# Altium PCB PCB1.PcbDoc
Units mm, origin at the board's own origin, x right, y up, seen from the top; angles counter-clockwise.
Board outline 153.16 x 82.8 mm, 2 copper layers (Top Layer, Bottom Layer); 35 components, 46 nets, 162 pads, 2 vias.
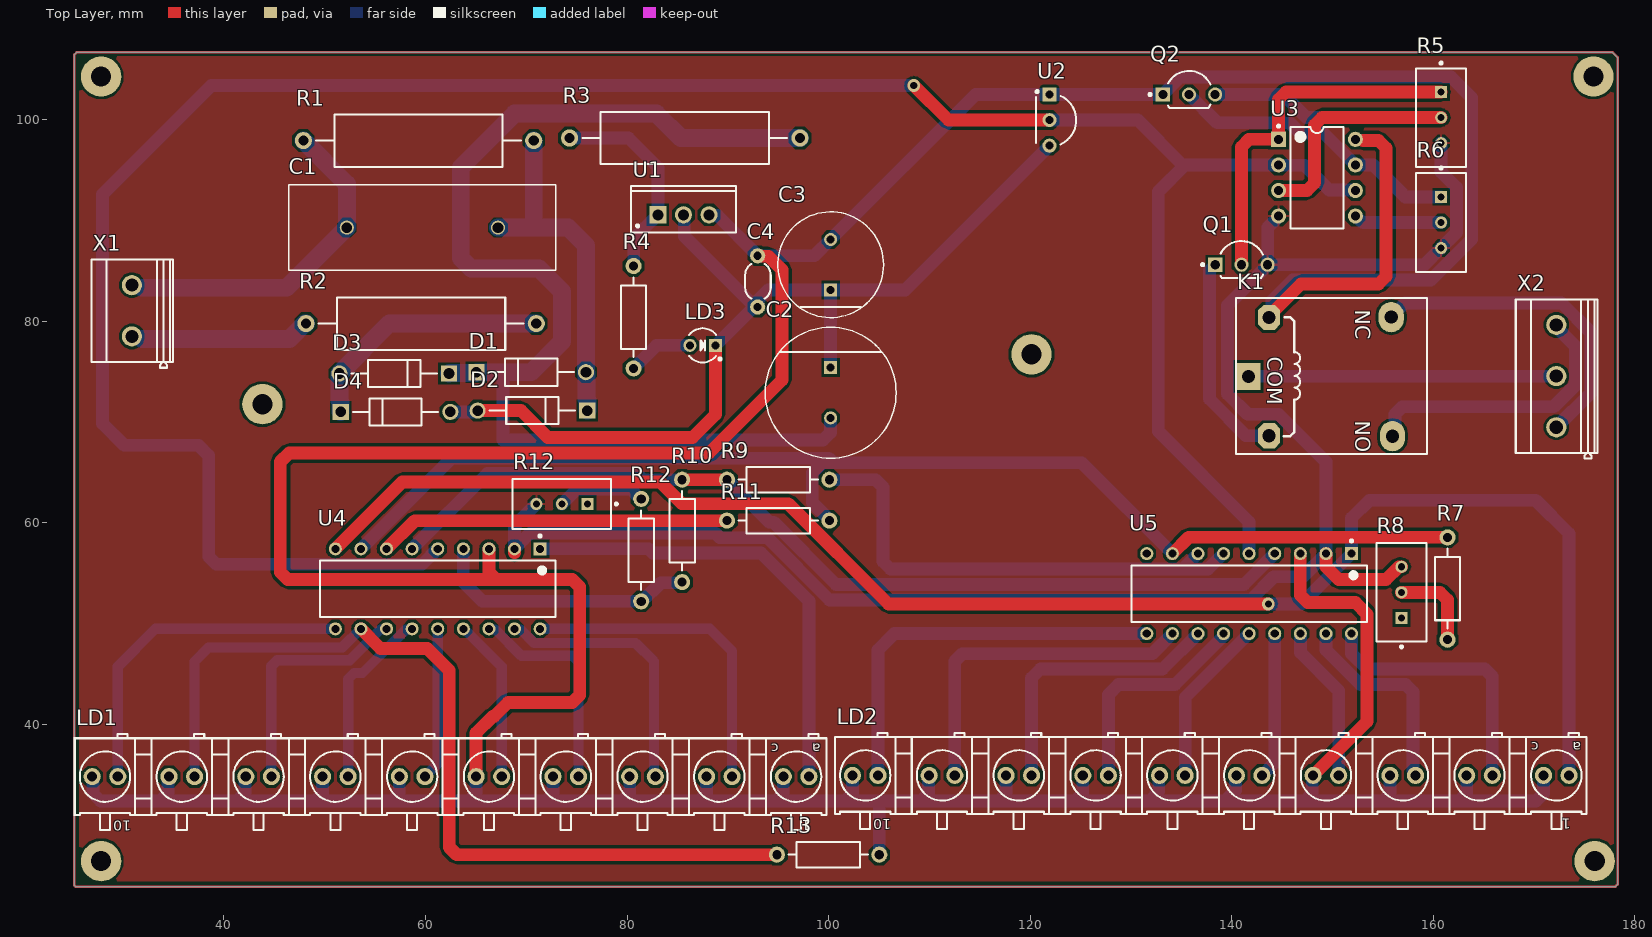
[diagram p0: Top Layer view]
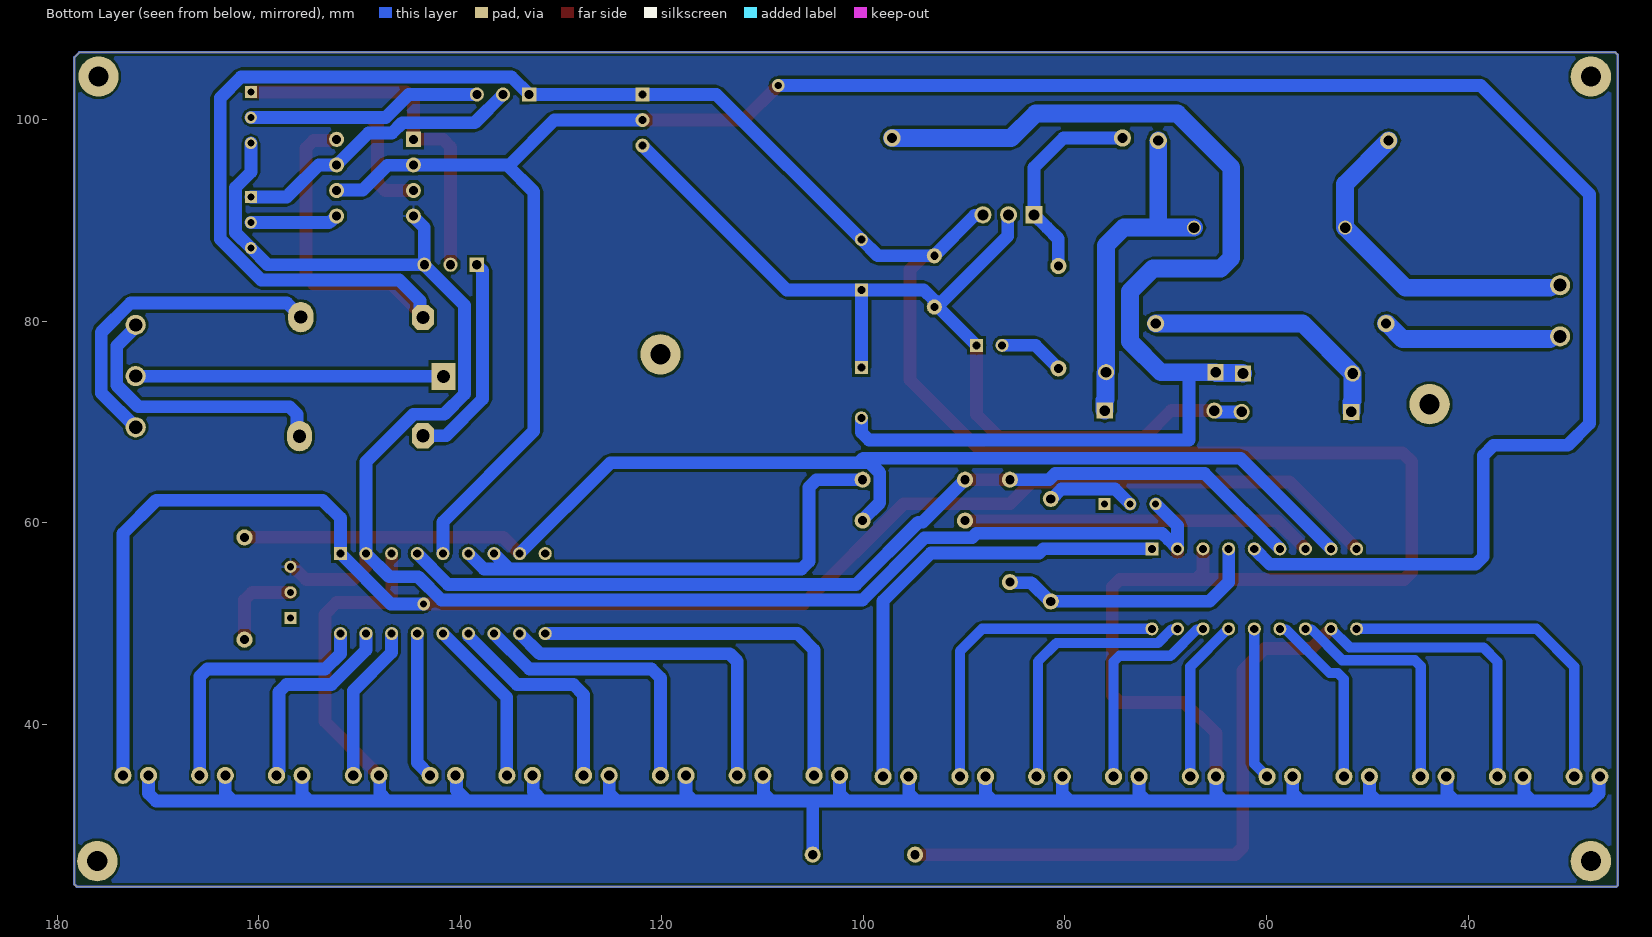
[diagram p1: Bottom Layer view, seen from below]
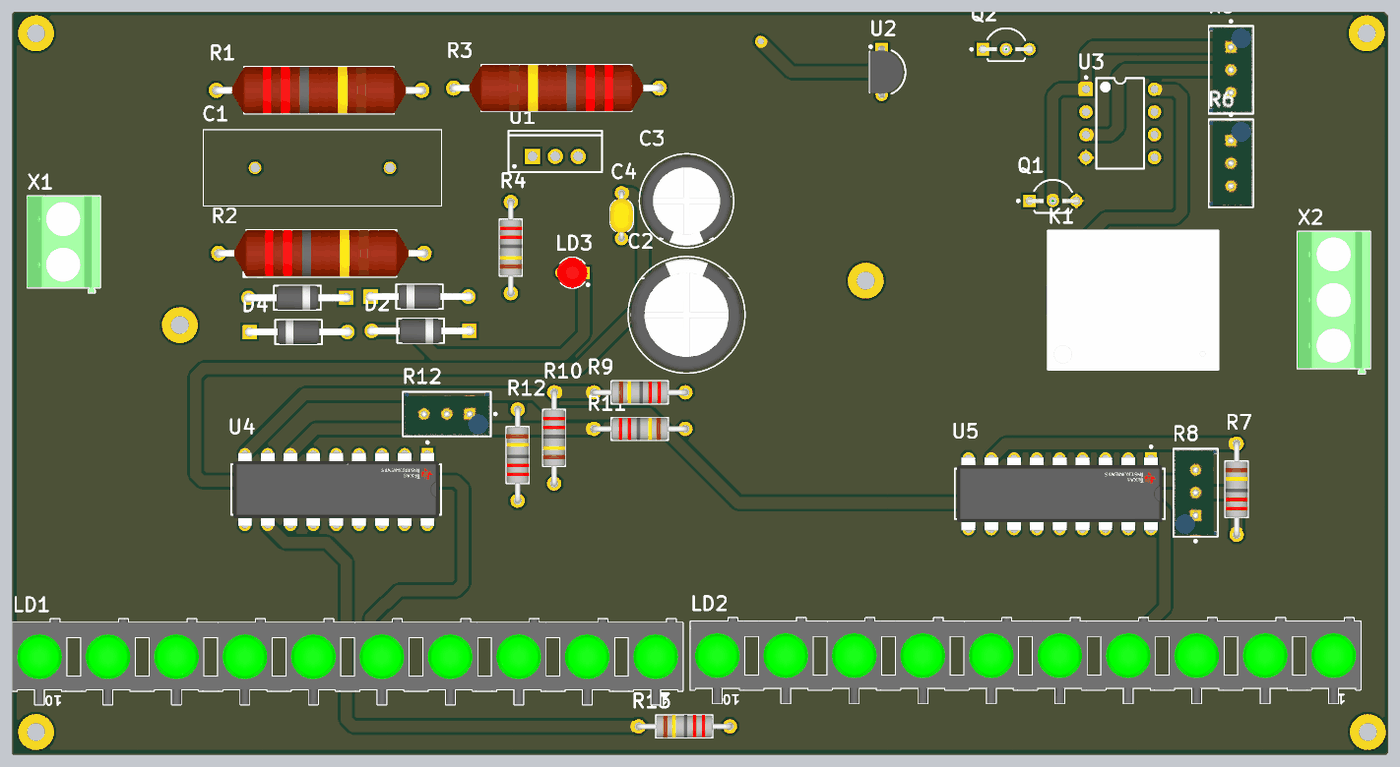
[diagram p2: 3D render of the assembled board from above, using the file's embedded part models]

## Layer stack, top to bottom
Top Solder: solder mask 0.0102, Solder Resist, Dk 3.5
Top Layer: signal copper 0.0356
Dielectric 1: dielectric 0.32, FR-4, Dk 4.8
Bottom Layer: signal copper 0.0356
Bottom Solder: solder mask 0.0102, Solder Resist, Dk 3.5

## Board outline
25.146,24.003 25.273,23.876 178.054,23.876 178.308,24.13 178.308,106.172 177.8,106.68 25.4,106.68 25.146,106.426

## Design rules (kind name [scope] priority, off if disabled: settings)
Clearance [All] p1: gap=0.254 ignorepadtopadclearanceinfootprint=FALSE except(0: Arc-Hole Track-Hole SMDPad-Hole THPad-Hole Via-Hole Fill-Hole Poly-Hole Region-Hole Text-Hole)
PolygonConnect [All] p1: connectstyle=Relief reliefconductorwidth=0.254 reliefentries=4 polygonreliefangle="90 Angle" airgapwidth=0.254
RoutingVias [All] p1: holewidth=0.711 width=1.27 viastyle="Through Hole" minholewidth=0.711 minwidth=1.27 maxholewidth=0.711 maxwidth=1.27
SolderMaskExpansion [All] p1: expansion=0.102 istentingtop=FALSE
Width [All] p1: maxlimit=2.032 minlimit=1.016 preferedwidth=1.27 minimp=50.000000 maximp=50.000000 favimp=50.000000
30 further rules are at their usual default settings.

## Components (designator, comment, footprint, x,y, rotation, side; value= is the part's Value field where it differs from the comment)
C1 "ECQE4105KTB" CAPRR1500W80L2650T850H2300 59.69,89.281 r0 top
C2 "ECA1HM102" FP-RAD-TH-D_12_5_0_5-L_25-MFG 100.203,72.898 r270 top
C3 "EEUFC1A102" FP-RAD-TH-D_10_0_5-L_16_1-MFG 100.203,85.598 r90 top
C4 "100pF" CAPRR508-254X381X584 92.964,83.947 r90 top
D1 "1N4007-E3/54" FP-1N4007-MFG 70.485,74.93 r0 top value=15pF
D2 "1N4007-E3/54" FP-1N4007-MFG 70.612,71.12 r180 top value=15pF
D3 "1N4007-E3/54" FP-1N4007-MFG 56.896,74.803 r180 top value=15pF
D4 "1N4007-E3/54" FP-1N4007-MFG 57.023,70.993 r0 top value=15pF
K1 "Relay 5pin Milon 5V" REL_MILON 148.844,74.549 r270 top
LD1 "Green" LED_MENTOR_2633.1180 96.774,34.798 r180 top
LD2 "Green" LED_MENTOR_2633.1180 172.212,34.925 r180 top
LD3 "Red" LED_3MM_RED_1C-2A 87.503,77.597 r180 top
Q1 "BC547BRL1G" ONSC-TO-92-3-29-11_AM_BL 140.97,85.598 r0 top
Q2 "BC547BRL1G" ONSC-TO-92-3-29-11_AM_BL 135.763,102.489 r0 top
R1 "1M" RES2286-1670X520 59.309,97.917 r0 top
R2 "100" RES2286-1670X520 59.563,79.756 r0 top
R3 "100" RES2286-1670X520 85.725,98.171 r180 top
R4 "1k1" RES1016-630X250 80.645,80.391 r90 top
R5 "3296W-1-103LF" FP-3296W-MFG 160.787,100.203 r180 top
R6 "3296W-1-103LF" FP-3296W-MFG 160.787,89.789 r180 top
R7 "1k" RES1016-630X250 161.417,53.467 r270 top
R8 "3296W-1-103LF" FP-3296W-MFG 156.845,53.086 r0 top
R9 "910" RES1016-630X250 94.996,64.262 r0 top
R10 "910" RES1016-630X250 85.471,59.182 r90 top
R11 "1k2" RES1016-630X250 94.996,60.198 r180 top
R12 "1R5" RES1016-630X250 81.407,57.277 r270 top
R12 "3296W-1-103LF" FP-3296W-MFG 73.533,61.849 r90 top
R13 "20k" RES1016-630X250 99.949,27.051 r0 top
U1 "L7805CV" TO220 85.598,90.551 r0 top
U2 "LM35DZ/NOPB" LP0003A 121.92,99.949 r0 top
U3 "LM358NG" ONSC-PDIP-8-626-05_M 148.463,94.234 r0 top
U4 "LM3914N-1" FP-NFK0018A-MFG 61.214,53.435 r270 top
U5 "LM3914N-1" FP-NFK0018A-MFG 141.732,52.959 r270 top
X1 "CON_Phoenix_MKDSN_02" CON_MKDSN1,5/2-5,08 30.861,81.026 r90 top
X2 "CON_Phoenix_MKDSN_03" CON_MKDSN1,5/3-5,08 172.212,74.549 r90 top

## Footprints (in the part's own frame and the unit in brackets; to place one, negate y for a bottom-side part, rotate by r counter-clockwise, add the part's x,y. Pads: shape width x height; smd on the part's side, far side on the other; paste and mask are expansions set on the pad)
CAPRR508-254X381X584 [mm] "Capacitor Radial Rounded (KEMET C317), Pin spacing 5.08mm - Body With 2.54mm X Body Length 3.81mm X Body Height 5.84mm"
  round 1.5 hole 0.8: 1(-2.54,0) 2(2.54,0)
  silkscreen extent -1.72,-1.3 1.72,1.24, body extent -2.79,-1.27 2.79,1.27, height 5.84
CAPRR1500W80L2650T850H2300 [mm]
  round 1.4 hole 1.05: 1(-7.5,0) 2(7.5,0)
  silkscreen extent -13.25,-4.25 13.25,4.25
CON_MKDSN1,5/2-5,08 [mm]
  round 2 hole 1.3: 1(-2.54,0) 2(2.54,0)
  silkscreen extent -5.65,-4.07 5.08,4.03, body extent -5.64,-4.05 5.09,4.05, height 10.03
CON_MKDSN1,5/3-5,08 [mm]
  round 2 hole 1.3: 1(-5.08,0) 2(0,0) 3(5.08,0)
  silkscreen extent -8.19,-4.07 7.62,4.03, body extent -8.19,-4.07 7.62,4.03, height 10.03
FP-1N4007-MFG [mm]
  rect 1.6x1.6 hole 1.05 paste-1000 mask+0: 1(-5.438,0)
  round 1.6 hole 1.05 paste-1000 mask+0: 2(5.438,0)
  silkscreen extent -4.24,-1.35 4.24,1.35, body extent -6.34,-1.45 6.34,1.45, height 0.25
FP-3296W-MFG [mm]
  rect 1.2x1.2 hole 0.7 paste-1000 mask+0: 1(0.005,-2.54)
  round 1.2 hole 0.7 paste-1000 mask+0: 2(0.005,0) 3(0.005,2.54)
  silkscreen extent -2.48,-5.52 2.48,4.89, body extent -2.58,-4.99 2.58,4.99, height 0.25
FP-NFK0018A-MFG [mm]
  rect 1.3x1.3 hole 0.8 paste-1000 mask+0: 1(-3.969,10.16)
  round 1.3 hole 0.8 paste-1000 mask+0: 2(-3.969,7.62) 3(-3.969,5.08) 4(-3.969,2.54) 5(-3.969,0) 6(-3.969,-2.54) 7(-3.969,-5.08) 8(-3.969,-7.62) 9(-3.969,-10.16) 10(3.969,-10.16) 11(3.969,-7.62) 12(3.969,-5.08) 13(3.969,-2.54) 14(3.969,0) 15(3.969,2.54) 16(3.969,5.08) 17(3.969,7.62) 18(3.969,10.16)
  silkscreen extent -5.37,-11.68 2.8,11.68, body extent -4.72,-12.04 4.72,12.04, height 0.25
FP-RAD-TH-D_10_0_5-L_16_1-MFG [mm]
  rect 1.3x1.3 hole 0.8 paste-1000 mask+0: 1(-2.5,0)
  round 1.3 hole 0.8 paste-1000 mask+0: 2(2.5,0)
  silkscreen extent -5.25,-5.25 5.25,5.25, body extent -5.35,-5.35 5.35,5.35, height 0.25
FP-RAD-TH-D_12_5_0_5-L_25-MFG [mm]
  rect 1.3x1.3 hole 0.8 paste-1000 mask+0: 1(-2.5,0)
  round 1.3 hole 0.8 paste-1000 mask+0: 2(2.5,0)
  silkscreen extent -6.5,-6.5 6.5,6.5, body extent -6.6,-6.6 6.6,6.6, height 0.25
LED_3MM_RED_1C-2A [mm] "LED, Red, Body Dia. 3.43 mm, Pin spacing 2.54mm"
  rect 1.3x1.3 hole 0.8: 1(-1.27,0)
  round 1.3 hole 0.8: 2(1.27,0)
  silkscreen extent -1.85,-1.7 1.34,1.7, body extent -1.71,-1.71 1.72,1.72, height 9.85
LED_MENTOR_2633.1180 [mm] "10x Diameter 5mm Green LED Vertical LED Array"
  round 1.7 hole 1: A1(-1.27,0) A2(6.35,0) A3(13.97,0) A4(21.59,0) A5(29.21,0) A6(36.83,0) A7(44.45,0) A8(52.07,0) A9(59.69,0) A10(67.31,0) C1(1.27,0) C2(8.89,0) C3(16.51,0) C4(24.13,0) C5(31.75,0) C6(39.37,0) C7(46.99,0) C8(54.61,0) C9(62.23,0) C10(69.85,0)
  silkscreen extent -3,-4.21 71.58,5.31, body extent -3,-4.21 71.58,5.31, height 17.1
LP0003A [mm] "TO, Flat Index; 3 In-Line, Formed Axial Leads; Body Dia. 4.8mm; Leads 0.56 x 0.41 mm (max)"
  rrect7% 1.4x1.4 hole 0.8: 1(0,2.54)
  round 1.4 hole 0.8: 2(0,0) 3(0,-2.54)
  silkscreen extent -1.35,-2.41 2.65,2.95, body extent -1.33,-2.83 2.35,2.83, height 9.01
ONSC-PDIP-8-626-05_M [mm] "DIP, 8-Leads, Body 10x7.1mm, Pitch 2.54mm"
  rect 1.5x1.5 hole 0.9: 1(-3.81,3.81)
  round 1.5 hole 0.9: 2(-3.81,1.27) 3(-3.81,-1.27) 4(-3.81,-3.81) 5(3.81,-3.81) 6(3.81,-1.27) 7(3.81,1.27) 8(3.81,3.81)
  silkscreen extent -3.93,-5.05 2.65,5.23, body extent -3.95,-5 3.95,5, height 5.33
ONSC-TO-92-3-29-11_AM_BL [mm] "TO, 3-Leads, Body Dia 4.7mm, Pitch 2.6mm"
  rect 1.4x1.4 hole 0.9: 1(-2.6,0)
  round 1.4 hole 0.9: 2(0,0) 3(2.6,0)
  silkscreen extent -3.97,-1.34 2.13,2.35, body extent -2.84,-1.34 2.84,2.35, height 5.33
REL_MILON [mm]
  rect 2.7x2.4 hole 1.3: 1(0.051,-7.177)
  oval 3x2.5 hole 1.3: 2(-5.842,6.985) 3(5.969,7.112)
  oct 2.5x2.2 hole 1.3: 4(-5.824,-5.127) 5(5.926,-5.127)
  silkscreen extent -7.75,-8.43 7.75,10.54, body extent -7.75,-8.46 7.75,10.54, height 15.8
RES1016-630X250 [mm] "Resistor, Axial, Pad spacing 10.16 mm - Body Lengh 6.3mm X Body Diameter 2.5mm"
  round 1.6 hole 0.9: 1(-5.08,0) 2(5.08,0)
  silkscreen extent -3.95,-1.25 3.95,1.25, body extent -5.38,-1.27 5.38,1.26, height 2.51
RES2286-1670X520 [mm] "Resistor, Axial, Pad spacing 22.22 mm - Body Lengh 16.7mm X Body Diameter 5.2mm"
  round 1.7 hole 1: 1(-11.43,0) 2(11.43,0)
  silkscreen extent -10.16,-2.6 10.16,2.6, body extent -11.82,-2.6 11.82,2.6, height 5.2
TO220 [mm] "TO, Thru-Hole, Vertical, Heatsink Mounted; 3 In-Line Leads; Pitch 2.54 mm"
  rect 1.7x1.7 hole 1.1: 1(-2.54,0)
  round 1.7 hole 1.1: 2(0,0) 3(2.54,0)
  silkscreen extent -5.2,-1.75 5.2,2.85, body extent -5.25,-1.8 5.25,2.9, height 19.7

## Part data
C1: Package=None, Availability=Unavailable, MP=ECQE4105KTB, Price=None
C2: library part CMP-05427-001975-1, "Aluminum Electrolytic Capacitors (Radial Lead Type) 1000uF ±20% 50V", Capacitance=1mF, Case/Package=Radial, Max Operating Temperature=85°C, Min Operating Temperature=-40°C, Package Quantity=200, Ripple Current=1.05A, Tolerance=20%, Voltage Rating=50V, Construction=RADIAL, Diameter=12.5mm, Dissipation Factor=0.12%, Height=25mm, Height - Seated (Max)=1.063inch, Lead Diameter=0.6mm, Lead Pitch=5mm, Lead/Base Style=Straight, Length=25mm, Life (Hours)=2000Hour, Mount="Through Hole", Packaging=Bulk, Polarity=Polar, Radiation Hardening=No, REACH SVHC="No SVHC", RoHS Compliant=Yes, Series=M, Termination=Radial, Voltage Rating (DC)=50V
C3: library part CMP-05427-000979-1, "Aluminum Electrolytic Capacitors (Radial Lead Type) AEC-Q200 Qualified 1000uF ±20% 10V", Capacitance=1mF, Case/Package=Radial, Dielectric Material=Aluminium, ESR (Equivalent Series Resistance)=68mR, Leakage Current=3uA, Max Operating Temperature=105°C, Min Operating Temperature=-55°C, Package Quantity=200, Ratings=AEC-Q200, Ripple Current=1.05A, Tolerance=20%, Voltage=10V, Construction=RADIAL, Contact Plating=Tin, Diameter=10mm, Height=16mm, Height - Seated (Max)=0.63inch, Impedance=68mR, Lead Diameter=0.6mm, Lead Free="Lead Free", Lead Pitch=5mm, Length=16mm, Life (Hours)=3000Hour, Mount="Through Hole", Packaging=Bulk, Radiation Hardening=No, REACH SVHC="No SVHC", RoHS Compliant=Yes, Series=FC, Size=16mm, Termination=Radial, Voltage Rating=10V, Voltage Rating (DC)=10V
C4: library part CCR_100PF_100V_5%_COG_508-254X381X584, "Non-polarised capacitor", Case="LS5.08 W2.54 x L3.81 x H5.84", Manufacturer=GENERIC, Manufacturer1 ComponentHeight=5.84mm, Manufacturer1 Example=KEMET, Manufacturer1 Part Number=C317C101J1G5TA, Tolerance=±5%, Voltage=100VDC, Author="CERN DEM JLC", Component Type=Standard, ComponentHeight=5.84mm, CreateDate=12/17/2008, HelpURL=\\cern.ch\dfs\Applications\Altium\Datasheets\CCR_KEMET_C317.pdf, LatestRevisionDate=12/17/2008, Manufacturer Part Number=CCR_100PF_100V_5%_COG_508-254X381X584, Mounted=Yes, Part Description="Radial Lead Type Multilayer Ceramic Capacitor", Part Number=CCR_100PF_100V_5%_COG_508-254X381X584, Pin Count=2, SMD=No, Socket=No, Status=None, Table="Capacitors THD", TC=COG
D1 D2 D3 D4: library part CMP-02540-000046-1, "DIODE GEN PURP 1KV 1A DO204AL", Capacitance=15pF, Forward Current=1A, Manufacturer=Vishay, Max Junction Temp=+150°C, Max Repetitive Reverse Voltage=1000V, Max Surge Forward Current=30A, Package=1N4007, Peak Reverse Current=30uA, Temperature="-50°C to +150°C", Temperature Range Low=-50°C, Automotive=No, Category=Diode, ComponentLink2Description=Datasheet, ComponentLink2URL=http://www.vishay.com/docs/88503/1n4001.pdf, Device Class L1="Discrete Semiconductors", Device Class L2=Diodes, Device Class L3="Rectifier Diodes", Digikey Description="DIODE GEN PURP 1KV 1A DO204AL", Height=2.7mm, Ipc Land Pattern Name=DIOPA1088W105L520D270, Lead Free=Yes, Manufacturer Part Number=1N4007-E3/54, Mouser Description="Rectifiers Vr/1000V Io/1A", Octopart=https://octopart.com/1n4007-e3%2F54-vishay-39548207, RoHS=TRUE, Temperature Range High=+150°C
K1: PartNumber=HJR-21FF-S-Z-05VDC
LD1 LD2: library part LED_MENTOR_2633.1180, "10x Diameter 5mm Green LED Vertical LED Array", Manufacturer=MENTOR, Manufacturer Part Number=2633.1180, Author="CERN DEM JLC", Color=Green, Component Type=Standard, ComponentHeight=17.1mm, CreateDate=11/28/2012, HelpURL=\\cern.ch\dfs\Applications\Altium\Datasheets\LED_MENTOR_2633.1180.pdf, LatestRevisionDate=3/7/2013, Mounted=Yes, PackageDescription="10x Diameter 5mm Green LED Vertical LED Array", Part Description="10x Diameter 5mm Green LED Vertical LED Array", Part Number=LED_MENTOR_2633.1180, Pin Count=20, SMD=No, Socket=No, Table="LEDs & Displays"
LD3: library part LED_AVAGO_HLMP-1700, "LED Red 1C 2A", Manufacturer="AVAGO TECHNOLOGIES", Manufacturer Part Number=HLMP-1700, Author="CERN DEM JLC", Color=Red, Component Type=Standard, ComponentHeight=6.35mm(min), CreateDate=6/12/2008, HelpURL=\\cern.ch\dfs\Applications\Altium\Datasheets\LED_AVAGO_HLMP-1700.pdf, LatestRevisionDate=3/17/2010, Mounted=Yes, PackageDescription="LED, Red, Body Dia. 3.43 mm, Pin spacing 2.54mm", Part Description="3mm Red LED", Part Number=LED_AVAGO_HLMP-1700, Pin Count=2, SMD=No, Socket=No, Table="LEDs & Displays"
Q1 Q2: library part CMP-1048-01605-1, "Amplifier Transistor, NPN Silicon, 3-Pin TO-92, Pb-Free, Tape and Reel", Manufacturer="On Semiconductor", ComponentLink1Description="Manufacturer URL", ComponentLink1URL=http://www.onsemi.com/, ComponentLink2Description=Datasheet, ComponentLink2URL=http://www.onsemi.com/pub_link/Collateral/BC546-D.PDF, ComponentLink3Description="Package Specification", ComponentLink3URL=http://www.onsemi.com/pub_link/Collateral/MAC97-D.PDF, DatasheetVersion="Rev. 7", fT Min (MHz)=150, IC Continuous (A)=0.1, Mounting Technology="Through Hole", PackageDescription="3-Pin Transistor Outline, Body 4.825 x 3.685 mm, Pitch 1.27 mm", PackageReference=TO-92-3-29-11_AM_BL, PackageVersion="Rev. AM", Packing="Tape and Reel", PartNumber=BC547BRL1G, Polarity=NPN, RoHS=TRUE
R1: library part RMF_1M_5%_3W_250PPM_2286-1670X520, "Resistor - 5%", Case="LS22.86 L16.7 x D5.2", Manufacturer=GENERIC, Manufacturer1 ComponentHeight=5.2mm, Manufacturer1 Example="VISHAY BCCOMPONENT", Manufacturer1 Part Number=PR03000201004JAC00, Power=3W, Tolerance=±5%, Author="CERN DEM JLC", Component Type=Standard, ComponentHeight=5.2mm, CreateDate=6/23/2008, HelpURL=\\cern.ch\dfs\Applications\Altium\Datasheets\RMF_VISHAY_PR03.pdf, LatestRevisionDate=10/1/2012, Manufacturer Part Number=RMF_1M_5%_3W_250PPM_2286-1670X520, Mounted=Yes, Part Description="Leaded Power Metal Film Resistor", Part Number=RMF_1M_5%_3W_250PPM_2286-1670X520, Pin Count=2, SMD=No, Socket=No, Status=Preferred, Table="Resistors THD", TC=±250ppm/°C
R2 R3: library part RMF_100R_5%_3W_250PPM_2286-1670X520, "Resistor - 5%", Case="LS22.86 L16.7 x D5.2", Manufacturer=GENERIC, Manufacturer1 ComponentHeight=5.2mm, Manufacturer1 Example="VISHAY BCCOMPONENT", Manufacturer1 Part Number=PR03000201000JAC00, Power=3W, Tolerance=±5%, Author="CERN DEM JLC", Component Type=Standard, ComponentHeight=5.2mm, CreateDate=6/19/2008, HelpURL=\\cern.ch\dfs\Applications\Altium\Datasheets\RMF_VISHAY_PR03.pdf, LatestRevisionDate=10/1/2012, Manufacturer Part Number=RMF_100R_5%_3W_250PPM_2286-1670X520, Mounted=Yes, Part Description="Leaded Power Metal Film Resistor", Part Number=RMF_100R_5%_3W_250PPM_2286-1670X520, Pin Count=2, SMD=No, Socket=No, Status=Preferred, Table="Resistors THD", TC=±250ppm/°C
R4: library part RMF_1K1_1%_0.6W_50PPM_1016-630X250, "Resistor - 1%", Case="LS10.16 L6.3 x D2.5", Manufacturer=GENERIC, Manufacturer1 ComponentHeight=2.5mm, Manufacturer1 Example="VISHAY BEYSCHLAG", Manufacturer1 Part Number=MBB02070C1101FCT00, Power=0.6W, Tolerance=±1%, Author="CERN DEM JLC", Component Type=Standard, ComponentHeight=2.5mm, CreateDate=12/4/2007, HelpURL=\\cern.ch\dfs\Applications\Altium\Datasheets\RMF_VISHAY_MBB0207.pdf, LatestRevisionDate=4/7/2008, Manufacturer Part Number=RMF_1K1_1%_0.6W_50PPM_1016-630X250, Mounted=Yes, Part Description="Leaded Metal Film Resistor", Part Number=RMF_1K1_1%_0.6W_50PPM_1016-630X250, Pin Count=2, SMD=No, Socket=No, Status=Preferred, Table="Resistors THD", TC=±50ppm/°C
R5 R6 R8 R12: library part CMP-1747-00001-5, "TRIMMER 10K OHM 0.5W PC PIN TOP", Color=Blue, Insulation Resistance=1GR, Max Operating Temperature=125°C, Max Power Dissipation=500mW, Min Operating Temperature=-55°C, Package Quantity=50, Resistance=10kR, Resistance Tolerance=10%, Resistor Type=Cermet, Temperature Coefficient=100ppm/°C, Contact Plating=Tin, Depth=4.83mm, Height=11.55mm, Lead Free="Lead Free", Length=9.53mm, Military Standard=Not, Mount="Through Hole", Number of Turns=25, Packaging=Rail/Tube, Power Rating=500mW, Radiation Hardening=No, Reach SVHC Compliant=Yes, RoHS Compliant=Yes, Series=3296, Taper=Linear, Technology=CERMET, Termination=Pin, Tolerance=10%, Weight=0.03oz, Width=9.53mm
R7: library part RMF_1K_1%_0.6W_50PPM_1016-630X250, "Resistor - 1%", Case="LS10.16 L6.3 x D2.5", Manufacturer=GENERIC, Manufacturer1 ComponentHeight=2.5mm, Manufacturer1 Example="VISHAY BEYSCHLAG", Manufacturer1 Part Number=MBB02070C1001FCT00, Power=0.6W, Tolerance=±1%, Author="CERN DEM JLC", Component Type=Standard, ComponentHeight=2.5mm, CreateDate=12/4/2007, HelpURL=\\cern.ch\dfs\Applications\Altium\Datasheets\RMF_VISHAY_MBB0207.pdf, LatestRevisionDate=4/7/2008, Manufacturer Part Number=RMF_1K_1%_0.6W_50PPM_1016-630X250, Mounted=Yes, Part Description="Leaded Metal Film Resistor", Part Number=RMF_1K_1%_0.6W_50PPM_1016-630X250, Pin Count=2, SMD=No, Socket=No, Status=Preferred, Table="Resistors THD", TC=±50ppm/°C
R9 R10: library part RMF_910R_1%_0.6W_50PPM_1016-630X250, "Resistor - 1%", Case="LS10.16 L6.3 x D2.5", Manufacturer=GENERIC, Manufacturer1 ComponentHeight=2.5mm, Manufacturer1 Example="VISHAY BEYSCHLAG", Manufacturer1 Part Number=MBB02070C9100FCT00, Power=0.6W, Tolerance=±1%, Author="CERN DEM JLC", Component Type=Standard, ComponentHeight=2.5mm, CreateDate=12/4/2007, HelpURL=\\cern.ch\dfs\Applications\Altium\Datasheets\RMF_VISHAY_MBB0207.pdf, LatestRevisionDate=4/7/2008, Manufacturer Part Number=RMF_910R_1%_0.6W_50PPM_1016-630X250, Mounted=Yes, Part Description="Leaded Metal Film Resistor", Part Number=RMF_910R_1%_0.6W_50PPM_1016-630X250, Pin Count=2, SMD=No, Socket=No, Status=Preferred, Table="Resistors THD", TC=±50ppm/°C
R11: library part RMF_1K2_1%_0.6W_50PPM_1016-630X250, "Resistor - 1%", Case="LS10.16 L6.3 x D2.5", Manufacturer=GENERIC, Manufacturer1 ComponentHeight=2.5mm, Manufacturer1 Example="VISHAY BEYSCHLAG", Manufacturer1 Part Number=MBB02070C1201FCT00, Power=0.6W, Tolerance=±1%, Author="CERN DEM JLC", Component Type=Standard, ComponentHeight=2.5mm, CreateDate=12/4/2007, HelpURL=\\cern.ch\dfs\Applications\Altium\Datasheets\RMF_VISHAY_MBB0207.pdf, LatestRevisionDate=4/7/2008, Manufacturer Part Number=RMF_1K2_1%_0.6W_50PPM_1016-630X250, Mounted=Yes, Part Description="Leaded Metal Film Resistor", Part Number=RMF_1K2_1%_0.6W_50PPM_1016-630X250, Pin Count=2, SMD=No, Socket=No, Status=Preferred, Table="Resistors THD", TC=±50ppm/°C
R12: library part RMF_1R5_1%_0.6W_50PPM_1016-630X250, "Resistor - 1%", Case="LS10.16 L6.3 x D2.5", Manufacturer=GENERIC, Manufacturer1 ComponentHeight=2.5mm, Manufacturer1 Example="VISHAY BEYSCHLAG", Manufacturer1 Part Number=MBB02070C1508FCT00, Power=0.6W, Tolerance=±1%, Author="CERN DEM JLC", Component Type=Standard, ComponentHeight=2.5mm, CreateDate=12/4/2007, HelpURL=\\cern.ch\dfs\Applications\Altium\Datasheets\RMF_VISHAY_MBB0207.pdf, LatestRevisionDate=4/7/2008, Manufacturer Part Number=RMF_1R5_1%_0.6W_50PPM_1016-630X250, Mounted=Yes, Part Description="Leaded Metal Film Resistor", Part Number=RMF_1R5_1%_0.6W_50PPM_1016-630X250, Pin Count=2, SMD=No, Socket=No, Status="Not recommended", Table="Resistors THD", TC=±50ppm/°C
R13: library part RMF_20K_1%_0.6W_50PPM_1016-630X250, "Resistor - 1%", Case="LS10.16 L6.3 x D2.5", Manufacturer=GENERIC, Manufacturer1 ComponentHeight=2.5mm, Manufacturer1 Example="VISHAY BEYSCHLAG", Manufacturer1 Part Number=MBB02070C2002FCT00, Power=0.6W, Tolerance=±1%, Author="CERN DEM JLC", Component Type=Standard, ComponentHeight=2.5mm, CreateDate=12/4/2007, HelpURL=\\cern.ch\dfs\Applications\Altium\Datasheets\RMF_VISHAY_MBB0207.pdf, LatestRevisionDate=4/7/2008, Manufacturer Part Number=RMF_20K_1%_0.6W_50PPM_1016-630X250, Mounted=Yes, Part Description="Leaded Metal Film Resistor", Part Number=RMF_20K_1%_0.6W_50PPM_1016-630X250, Pin Count=2, SMD=No, Socket=No, Status=Preferred, Table="Resistors THD", TC=±50ppm/°C
U1: library part CMP-0244-00483-1, "Positive Voltage Regulator, 5V, 3-Pin TO-220", ComponentLink1Description="Manufacturer URL", ComponentLink1URL=http://www.st.com, ComponentLink2Description=Datasheet, ComponentLink2URL=http://www.st.com/internet/com/TECHNICAL_RESOURCES/TECHNICAL_LITERATURE/DATASHEET/CD00000444.pdf, ComponentLink3Description="Package Specification", ComponentLink3URL=http://www.st.com/internet/com/TECHNICAL_RESOURCES/TECHNICAL_LITERATURE/PACKAGE_INFORMATION/CD00004649.pdf, DatasheetVersion=16/11/2011, PackageDescription="TO, Thru-Hole, Vertical, Heatsink Mounted; 3 In-Line Leads; Pitch 2.54 mm", PackageReference=TO220, PackageVersion=ver3.0
U2: library part CMP-0066-00030-3, "Precision Centigrade Temperature Sensor, 3-pin TO-92, Pb-Free", Manufacturer="Texas Instruments", PackageTopMarking=NSXYTT*LM35*DZ, PowerWise=N, Code_JEDEC=TO-226-AA, ComponentLink1Description="Datasheet URL", ComponentLink1URL=http://www.ti.com/general/docs/lit/getliterature.tsp?genericPartNumber=LM35&fileType=pdf, CompType="Temp Sensor IC", PackageDescription="TO-92, Molded, 3 Lead", PackageReference=LP0003A, PinCount=3, RoHS=Y
U3: library part CMP-1310-00096-1, "Single Supply Dual Operational Amplifier, 3 to 32 V, 0 to 70 degC, 8-Pin PDIP, Pb-Free, Tube", Manufacturer="On Semiconductor", ComponentLink1Description="Manufacturer URL", ComponentLink1URL=http://www.onsemi.com/, ComponentLink2Description=Datasheet, ComponentLink2URL=http://www.onsemi.cn/pub_link/Collateral/LM358-D.PDF, ComponentLink3Description="Package Specification", ComponentLink3URL=http://www.onsemi.com/pub_link/Collateral/LM211-D.PDF, DatasheetVersion="Rev. 27", Mounting Technology="Through Hole", PackageDescription="8-Pin Plastic Dual-In Line Package, Body 9.52 x 6.605 mm, Pitch 2.54 mm", PackageReference=PDIP-8-626-05, PackageVersion="Rev. M, 04/2010", Packing=Tube, PartNumber=LM358NG, RoHS=TRUE, VCC Max (V)=32, VCC Min (V)=3
U4 U5: library part CMP-0058-00006-4, "IC DRVR DOT/BAR DISPLAY 18DIP", Case/Package=DIP, Max Input Voltage=12V, Max Operating Temperature=70°C, Max Output Voltage=1.34V, Max Power Dissipation=1.365W, Max Supply Current=9.2kA, Max Supply Voltage=25V, Min Input Voltage=1.2V, Min Operating Temperature=0°C, Nominal Supply Current=9.2mA, Operating Supply Current=6.1mA, Output Current=30mA, Output Voltage=1.28V, Package Quantity=20, Height=3.3mm, Lead Free="Contains Lead", Length=22.86mm, Mount="Through Hole", Number of Channels=10, Number of Outputs=10, Number of Pins=18, Number of Segments=10, Packaging=Rail/Tube, Power Dissipation=1.365W, Radiation Hardening=No, REACH SVHC="No SVHC", RoHS Compliant=No, Series=-, Supply Current=9.2mA, Termination="Through Hole", Width=6.35mm
X1 X2: Manufacturer="PHOENIX CONTACT", Max Current="13.5 A", Voltage="400 V", Category=Connector, Company="SJ Libraries", ComponentLink1Description=Datasheet, ComponentLink2Description=Reference, Connector type="PCB Terminal Block", designer="Eng. Saeid Jorablo", HelpURL=http://s3.picofile.com/file/7443264187/Coming_Soon_logo.gif, Mounting Technology=Through-Hole, Publisher="SJ UnLimited", Revision 1="2012/10/1 : Adding Model", Status=Unreleased, Update=2012/10/1
  X1: Pin Count=2, Positions=2
  X2: Pin Count=3, Positions=3

## Free pads (board coordinates)
  round 4 hole 2: q(27.813,26.416) q(27.813,104.267) q(43.815,71.755) q(120.142,76.708) q(175.895,104.267) q(176.022,26.416)

## Via types
v1: diameter 1.27, hole 0.711, Top Layer to Bottom Layer, 2 vias

## Nets (pads, with @x,y where several pads share a name; then routed paths per layer and width w, separated by ;. In a path a pad name is that pad's centre, name@x,y a point inside that pad or via, vN(x,y) a via of type N, cw(c..) or ccw(c..) an arc to the next point about the centre after c; other vN are vias at no path point)
+5: C3.2 C4.2 K1.4 LD1.C1 LD1.C2 LD1.C3 LD1.C4 LD1.C5 LD1.C6 LD1.C7 LD1.C8 LD1.C9 LD1.C10 LD2.C1 LD2.C2 LD2.C3 LD2.C4 LD2.C5 LD2.C6 LD2.C7 LD2.C8 LD2.C9 LD2.C10 Q2.1 R13.2 U1.3 U2.1 U3.8 U4.3 U5.3 | length 524.7
  Top Layer w1.27: LD1.C5 65.024,39.116 66.675,40.767 66.802,40.767 68.199,42.164 74.567,42.164 75.311,42.908 75.311,53.612 74.567,54.356 67.038,54.356 ; U4.3 66.294,55.865 66.294,55.1 67.038,54.356 ; C4.2 93.008,86.443 94.024,86.443 95.377,85.09 95.377,74.168 88.138,66.929 46.482,66.929 45.593,66.04 45.593,55.1 46.337,54.356 67.038,54.356 ; K1.4 143.717,80.523 146.886,83.693 154.577,83.693 155.321,84.437 155.321,97.173 154.577,97.917 153.035,97.917 ; U5.3 146.812,52.814 147.556,52.07 152.273,52.07 153.431,50.912 153.431,40.274 LD2.C4
  Bottom Layer w1.27: LD1.C10 27.006,34.716 27.006,33.129 27.75,32.385 33.673,32.385 ; LD1.C9 34.462,34.716 34.462,33.174 33.673,32.385 ; LD1.C8 42.082,34.716 42.082,33.174 41.293,32.385 ; LD1.C7 49.784,33.129 49.04,32.385 ; LD1.C6 57.404,33.129 56.66,32.385 ; LD1.C5 65.024,33.129 64.28,32.385 ; LD1.C4 72.644,33.129 71.9,32.385 ; LD1.C3 80.264,33.129 79.52,32.385 ; LD1.C2 87.884,33.129 87.14,32.385 ; U1.3 88.22,90.469 88.982,90.469 C4.2 98.584,86.487 100.195,88.098 C3.2 114.594,102.489 U2.1 Q2.1 134.906,104.232 161.75,104.232 163.83,102.152 163.83,88.142 159.762,84.074 146.05,84.074 144.004,82.028 144.004,80.66 K1.4 ; LD1.C1 95.504,33.129 94.76,32.385 ; LD2.C10 102.362,33.129 101.618,32.385 ; R13.2 105.029,32.385 ; LD2.C9 109.9,34.843 109.9,33.174 109.111,32.385 ; LD2.C8 117.602,33.129 116.858,32.385 ; LD2.C7 125.222,33.129 124.478,32.385 ; LD2.C6 132.76,34.843 132.76,33.301 131.844,32.385 ; LD2.C5 140.38,34.843 140.38,33.446 139.319,32.385 ; LD2.C4 148,34.843 148,33.174 147.211,32.385 ; LD2.C3 155.702,33.129 154.958,32.385 ; LD2.C2 163.322,33.129 162.578,32.385 ; LD2.C1 170.942,33.129 170.198,32.385 162.578,32.385 ; 33.673,32.385 41.293,32.385 ; 41.293,32.385 49.04,32.385 ; 49.04,32.385 56.66,32.385 ; 56.66,32.385 64.28,32.385 ; 64.28,32.385 71.9,32.385 ; 71.9,32.385 79.52,32.385 ; 79.52,32.385 87.14,32.385 ; 87.14,32.385 94.76,32.385 ; 94.76,32.385 101.618,32.385 ; 101.618,32.385 105.029,32.385 ; 105.029,32.385 109.111,32.385 ; 109.111,32.385 116.858,32.385 ; 116.858,32.385 124.478,32.385 ; 124.478,32.385 131.844,32.385 ; 131.844,32.385 139.319,32.385 ; 139.319,32.385 147.211,32.385 ; 147.211,32.385 154.958,32.385 ; 154.958,32.385 162.578,32.385
GND: Q1.3 R5.3 R6.3 R8.3 R12.3 U3.4 U4.2 U5.2 | length 172.4
  Top Layer w1.27: U4.2@68.834,57.023 U4.2 ; U5.2 149.358,56.922 149.358,55.62 150.622,54.356 155.321,54.356 156.591,55.626 R8.3
  Bottom Layer w1.27: U4.2 68.834,57.412 U4.2@68.84,57.418 ; R12.3 68.84,59.701 U4.2@68.84,57.418 ; U3.4 144.653,90.362 143.57,89.279 Q1.3 ; R5.3 160.782,94.786 162.306,93.262 162.306,88.773 R6.3 159.131,85.598 Q1.3 ; U4.2@68.84,57.418 69.738,58.316 69.738,58.325 70.356,58.943 88.782,58.943 89.216,58.509 93.923,58.509 100.091,52.341 141.879,52.341 144.17,54.631 147.056,54.631 U5.2 149.352,66.045 144.635,70.762 141.595,70.762 139.578,72.78 139.578,81.57 143.57,85.563 Q1.3
NetC1_1: C1.1 R1.1 X1.2 | length 33.2
  Bottom Layer w1.778: 31.877,83.312 46.221,83.312 C1.1 52.19,93.606 R1.1
NetC1_2: C1.2 D1.2 D2.1 R1.2 | length 34.6
  Bottom Layer w1.778: C1.2 70.739,89.281 ; R1.2 70.739,89.281 ; D2.1 76.073,71.143 76.073,72.151 75.986,72.238 75.986,74.867 D1.2 75.923,87.526 74.168,89.281 70.739,89.281
NetC2_1: C2.1 C3.1 C4.1 D2.2 D4.2 LD3.1 U1.2 U2.3 | length 96.7
  Top Layer w1.27: D2.2 69.469,71.12 72.136,68.453 86.487,68.453 88.773,70.739 LD3.1
  Bottom Layer w1.27: D4.2 64.958,70.993 65.085,71.12 D2.2 ; U1.2 85.68,90.469 85.68,88.437 C4.1@92.666,81.451 ; LD3.1 92.539,81.363 92.92,81.363 C4.1 93.008,81.451 93.008,82.086 94.02,83.098 C3.1 ; C2.1 C3.1 ; U2.3 107.609,83.098 C3.1
NetC2_2: C2.2 D1.1 D3.1 R3.1 | length 115.9
  Bottom Layer w1.27: 68.072,74.93 67.691,74.549 67.691,68.199 99.459,68.199 100.203,68.943 C2.2
  Bottom Layer w1.778: D3.1 62.398,74.867 64.983,74.867 D1.1 68.072,74.93 70.485,74.93 73.533,77.978 73.533,82.931 71.247,85.217 64.542,85.217 63.5,86.259 63.5,95.25 68.834,100.584 82.931,100.584 85.344,98.171 R3.1
NetD3_2: D3.2 D4.1 R2.2 | length 25.4
  Bottom Layer w1.778: D4.1 51.585,71.986 51.473,72.098 51.473,74.788 D3.2 56.411,79.756 R2.2
NetK1_1: K1.1 X2.2 | length 30.6
  Bottom Layer w1.27: K1.1 141.692,74.524 172.187,74.524 X2.2
NetK1_2: K1.2 X2.1 | length 32.4
  Bottom Layer w1.27: K1.2 155.829,80.429 157.188,81.788 172.724,81.788 175.625,78.887 175.625,72.882 X2.1
NetK1_3: K1.3 X2.3 | length 28.1
  Bottom Layer w1.27: K1.3 156.191,68.815 156.191,70.757 156.935,71.501 171.958,71.501 174.101,73.644 174.101,77.542 172.212,79.431 X2.3
NetK1_5: K1.5 Q1.1 | length 21
  Bottom Layer w1.27: Q1.1 137.795,85.023 137.795,72.259 141.431,68.623 K1.5
NetLD1_A1: LD1.A1 U4.1 | length 46.2
  Bottom Layer w1.27: U4.1 82.131,57.404 82.55,56.985 93.291,56.985 98.044,52.232 LD1.A1
NetLD1_A2: LD1.A2 U4.18 | length 32.4
  Bottom Layer w1.016: U4.18 88.201,49.466 90.424,47.244 LD1.A2
NetLD1_A3: LD1.A3 U4.17 | length 26.7
  Bottom Layer w1.016: U4.17 68.888,49.412 69.431,49.412 70.789,48.054 80.851,48.054 82.673,46.232 82.673,34.929 LD1.A3
NetLD1_A4: LD1.A4 U4.16 | length 21.6
  Bottom Layer w1.016: U4.16 66.348,49.412 66.891,49.412 69.519,46.784 74.589,46.784 75.184,46.189 LD1.A4
NetLD1_A5: LD1.A5 U4.15 | length 16.2
  Bottom Layer w1.016: U4.15@63.817,49.466 67.564,45.72 LD1.A5
NetLD1_A6: LD1.A6 U4.14 | length 15.1
  Bottom Layer w1.016: LD1.A6 61.214,36.068 U4.14@61.214,49.39
NetLD1_A7: LD1.A7 U4.13 | length 18.1
  Bottom Layer w1.016: LD1.A7 52.324,44.49 52.919,45.085 53.749,45.085 58.077,49.412 58.62,49.412 U4.13
NetLD1_A8: LD1.A8 U4.12 | length 23.9
  Bottom Layer w1.016: LD1.A8 44.704,45.76 45.299,46.355 52.479,46.355 55.537,49.412 56.08,49.412 U4.12
NetLD1_A9: LD1.A9 R13.1 U4.11 | length 90.1
  Top Layer w1.27: U4.11 55.534,47.527 60.169,47.527 62.357,45.339 62.357,27.795 63.101,27.051 R13.1
  Bottom Layer w1.016: LD1.A9 37.084,46.228 38.481,47.625 51.752,47.625 U4.11
NetLD1_A10: LD1.A10 U4.10 | length 34.1
  Bottom Layer w1.016: LD1.A10 29.464,45.72 33.21,49.466 U4.10
NetLD2_A1: LD2.A1 U4.9 U5.1 | length 161.9
  Top Layer w1.27: U4.9 57.696,64.046 83.298,64.046 85.457,61.887 95.998,61.887 105.942,51.943 v1(143.637,51.943)
  Bottom Layer w1.27: v1(143.637,51.943) 146.907,51.943 U5.1 151.892,60.452 153.67,62.23 170.18,62.23 173.482,58.928 LD2.A1
NetLD2_A2: LD2.A2 U5.18 | length 26.7
  Bottom Layer w1.27: U5.18 151.898,48.985 151.898,46.984 153.416,45.466 165.118,45.466 165.862,44.722 LD2.A2
NetLD2_A3: LD2.A3 U5.17 | length 20.4
  Bottom Layer w1.27: U5.17 149.358,48.985 149.358,47.369 152.785,43.942 157.244,43.942 157.988,43.198 157.988,35.433 158.242,35.179 LD2.A3
NetLD2_A4: LD2.A4 U5.16 | length 15.6
  Bottom Layer w1.27: U5.16 146.818,48.985 146.818,47.111 150.622,43.307 LD2.A4
NetLD2_A5: LD2.A5 U5.15 | length 14.6
  Bottom Layer w1.27: LD2.A5 144.272,36.195 U5.15@144.272,48.982
NetLD2_A6: LD2.A6 U5.14 | length 16.7
  Bottom Layer w1.27: LD2.A6 135.382,42.64 U5.14
NetLD2_A7: LD2.A7 U5.13 | length 22.1
  Bottom Layer w1.27: LD2.A7 127.762,42.926 128.778,43.942 134.366,43.942 139.186,48.762 139.186,48.985 U5.13
NetLD2_A8: LD2.A8 U5.12 | length 28
  Bottom Layer w1.27: LD2.A8 120.142,44.577 121.031,45.466 133.128,45.466 U5.12@136.646,48.985
NetLD2_A9: LD2.A9 U5.11 | length 34
  Bottom Layer w1.27: LD2.A9 112.522,46.246 113.266,46.99 132.112,46.99 U5.11
NetLD2_A10: LD2.A10 U5.10 | length 39.8
  Bottom Layer w1.27: LD2.A10 104.902,47.371 106.521,48.99 U5.10
NetLD3_2: LD3.2 R4.1 | length 6.5
  Bottom Layer w1.27: R4.1 82.931,77.597 LD3.2
NetQ1_2: Q1.2 R5.1 U3.1 | length 36.1
  Top Layer w1.27: Q1.2 140.97,97.282 141.732,98.044 U3.1 144.653,101.999 145.397,102.743 R5.1
NetQ2_2: Q2.2 R6.1 U3.7 | length 29.2
  Bottom Layer w1.27: Q2.2 138.569,99.683 145.771,99.683 146.775,98.679 149.098,98.679 U3.7 154.051,95.504 156.718,92.837 157.226,92.329 R6.1
NetQ2_3: Q2.3 R5.2 U3.3 | length 45.9
  Top Layer w1.27: U3.3 147.465,92.964 148.209,93.708 148.209,99.459 148.953,100.203 R5.2
  Bottom Layer w1.27: Q2.3 145.12,102.489 147.406,100.203 R5.2
NetR2_1: R2.1 X1.1 | length 16.9
  Bottom Layer w1.778: 31.877,78.232 46.493,78.232 48.017,79.756 R2.1
NetR3_2: R3.2 R4.2 U1.1 | length 20.8
  Bottom Layer w1.27: R3.2 80.137,98.171 83.058,95.25 U1.1 81.788,89.281 81.77,89.281 80.665,88.176 80.665,85.491 R4.2
NetR6_2: R6.2 U3.5 | length 8.8
  Bottom Layer w1.27: U3.5 152.335,90.424 152.843,89.916 152.908,89.916 153.035,89.789 R6.2
NetR7_1: R7.1 R11.1 U4.8 U5.8 | length 124.1
  Top Layer w1.27: U5.8 134.12,56.928 135.739,58.547 R7.1
  Bottom Layer w1.27: U4.8 62.581,66.391 100.017,66.391 100.457,65.951 ; R11.1 100.076,60.287 98.387,61.976 98.387,64.962 99.376,65.951 100.457,65.951 ; U5.8 125.089,65.951 100.457,65.951
NetR7_2: R7.2 R8.2 | length 8.8
  Top Layer w1.27: R8.2 160.673,53.086 161.417,52.342 R7.2
NetR9_1: R9.1 R10.2 U4.6 U5.4 | length 94.5
  Top Layer w1.27: R10.2 R9.1
  Bottom Layer w1.27: U4.6 66.137,64.867 80.963,64.867 81.568,64.262 R10.2 ; R9.1 94.145,60.033 94.554,60.033 100.722,53.865 141.209,53.865 U5.4
NetR9_2: R9.2 U5.6 U5.7 | length 49.9
  Bottom Layer w1.27: R9.2 104.666,64.262 105.41,63.518 105.41,56.134 106.155,55.389 135.105,55.389 ; U5.7 136.644,56.928 135.105,55.389 ; U5.6 139.184,56.928 137.645,55.389 135.105,55.389
NetR10_1: R10.1 R12.2@81.407,52.197 U4.4 | length 26.6
  Bottom Layer w1.27: U4.4 63.754,54.102 65.659,52.197 81.407,52.197 81.496,52.197 83.338,54.039 85.408,54.039 R10.1
NetR11_2: R11.2 U4.7 | length 34.9
  Top Layer w1.27: U4.7 58.928,60.198 R11.2
NetR12_1: R12.1@81.407,62.357 R12.2@73.533,61.854 | length 8.9
  Bottom Layer w1.27: R12.2@73.533,61.854 75.022,63.343 80.332,63.343 81.318,62.357 R12.1@81.407,62.357
NetU2_2: U2.2 U3.2 U3.6 U4.5 U5.5 | length 244.8
  Top Layer w1.27: v1(108.458,103.378) 111.887,99.949 U2.2
  Bottom Layer w1.27: U4.5 61.206,57.404 59.667,55.865 39.258,55.865 38.481,56.642 38.481,66.675 37.465,67.691 30.099,67.691 27.94,69.85 27.94,92.583 38.735,103.378 v1(108.458,103.378) ; U2.2 130.683,99.949 135.128,95.504 U3.2 144.697,95.46 147.237,95.46 149.689,93.008 152.229,93.008 U3.6 ; 135.382,95.504 132.715,92.837 132.715,69.088 141.732,60.071 U5.5
pads on no net: R8.1 R12.1@76.073,61.854 U5.9

## Polygon pours and split planes (outlines as drawn)
GND on Bottom Layer "GND_L02_P000" (solid, pour order 0): 178.054,24.13 25.908,24.13 25.4,24.638 25.781,25.019 25.781,106.299 177.292,106.299 178.067,105.524 178.067,24.121
GND on Top Layer "GND_L01_P001" (solid, pour order 1): 177.895,24.422 25.87,24.422 25.654,24.638 25.654,106.426 177.419,106.426 178.054,105.791 178.054,24.257

## Other copper
Multi-Layer:
  the board outline again, w0.254

## Text inside footprints (layer, text, board x,y; h text height)
K1: Top Overlay "NC" at 152.273,81.153 h1.5 r270; Top Overlay "NO" at 152.273,70.104 h1.5 r270; Top Overlay "COM" at 143.51,76.479 h1.5 r270
LD1: Top Overlay "c" at 95.052,38.086 h1 r180; Top Overlay "10" at 30.801,30.436 h1 r180; Top Overlay "1" at 98.224,30.473 h1 r180; Top Overlay "a" at 99.232,38.061 h1 r180; Mechanical 14 "c" at 95.052,38.086 h1 r180; Mechanical 14 "10" at 30.801,30.436 h1 r180; Mechanical 14 "1" at 98.224,30.473 h1 r180; Mechanical 14 "a" at 99.232,38.061 h1 r180
LD2: Top Overlay "c" at 170.49,38.213 h1 r180; Top Overlay "10" at 106.239,30.563 h1 r180; Top Overlay "1" at 173.662,30.6 h1 r180; Top Overlay "a" at 174.67,38.188 h1 r180; Mechanical 14 "c" at 170.49,38.213 h1 r180; Mechanical 14 "10" at 106.239,30.563 h1 r180; Mechanical 14 "1" at 173.662,30.6 h1 r180; Mechanical 14 "a" at 174.67,38.188 h1 r180